# Altium PCB mesh_node.PcbDoc
Units mm, origin at the board's own origin, x right, y up, seen from the top; angles counter-clockwise.
Board outline 85 x 85 mm, 2 copper layers (Top Layer, Bottom Layer); 59 components, 64 nets, 274 pads, 0 vias.
Unrouted connection lines stored in the file: 175.
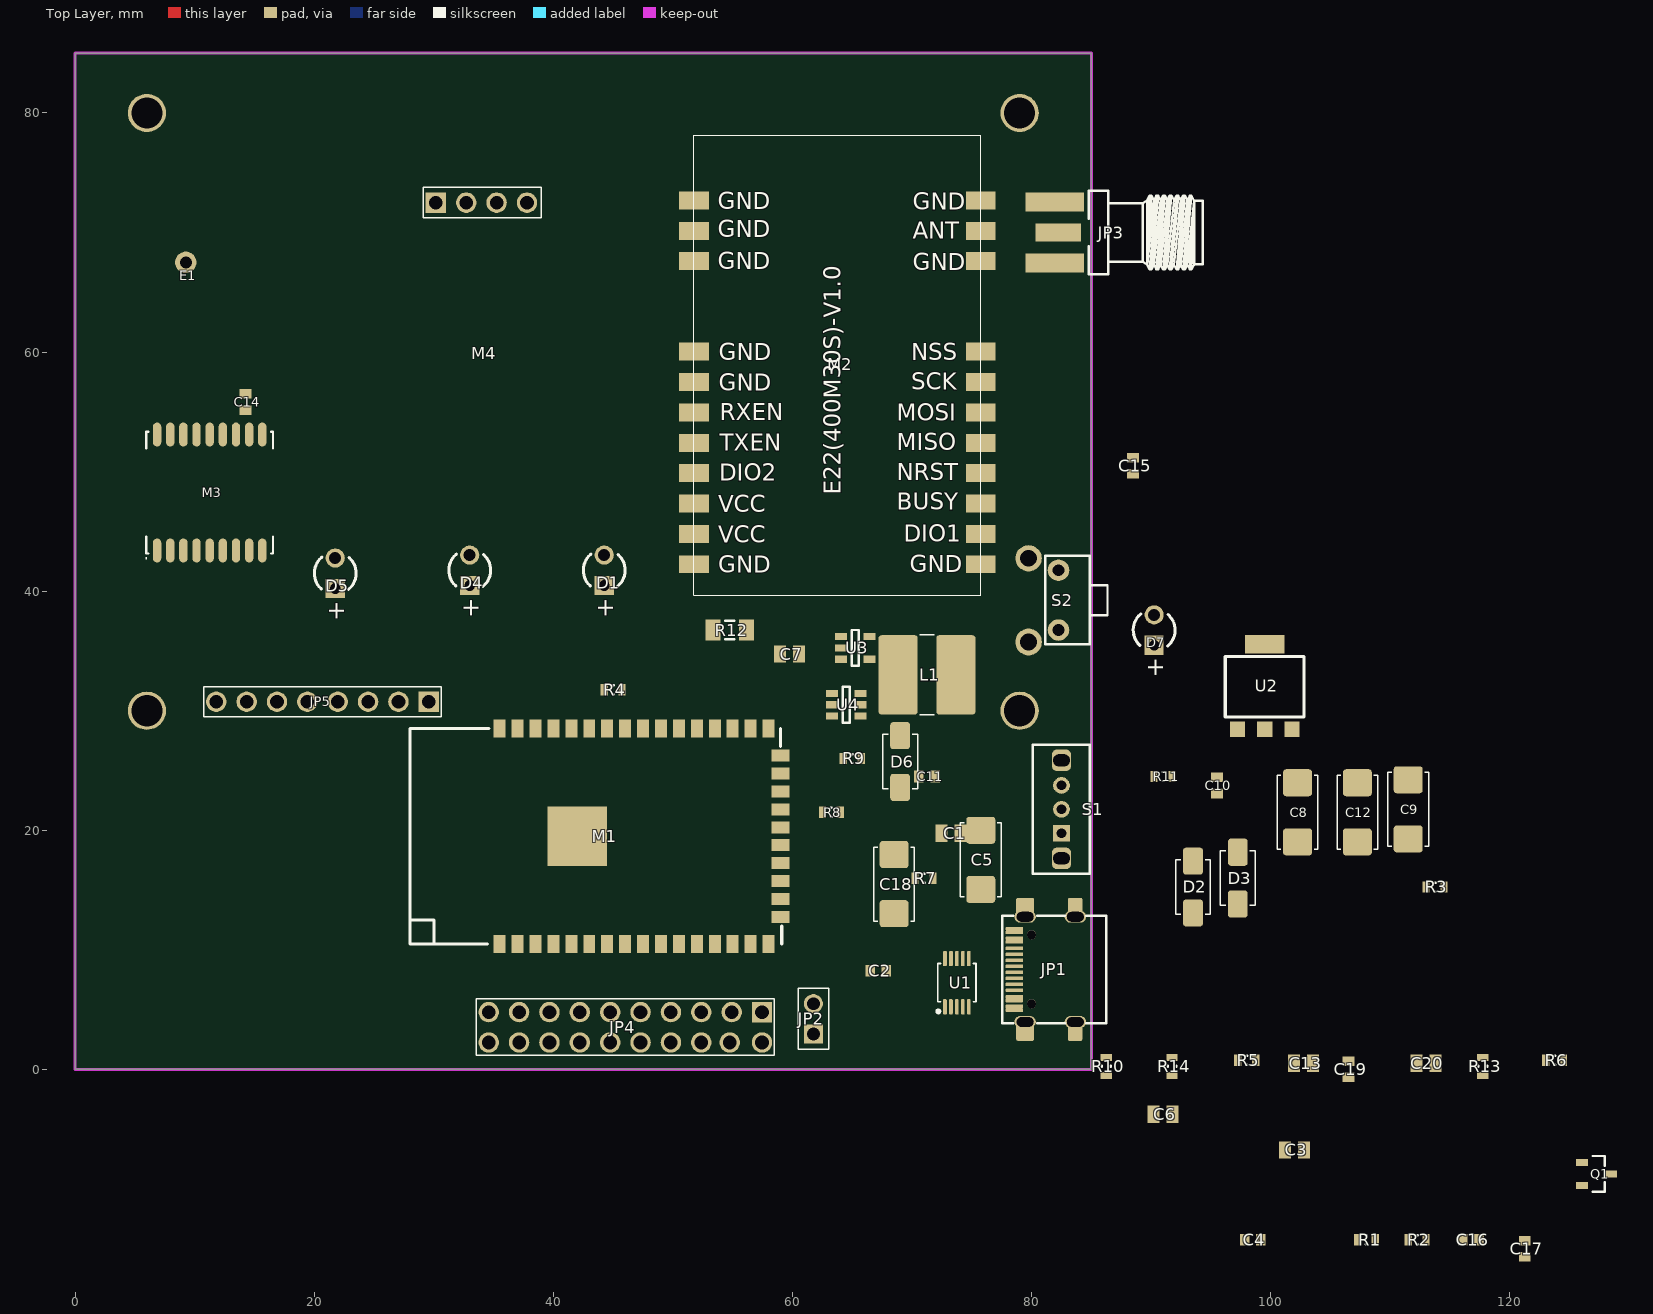
[diagram p0: Top Layer view]
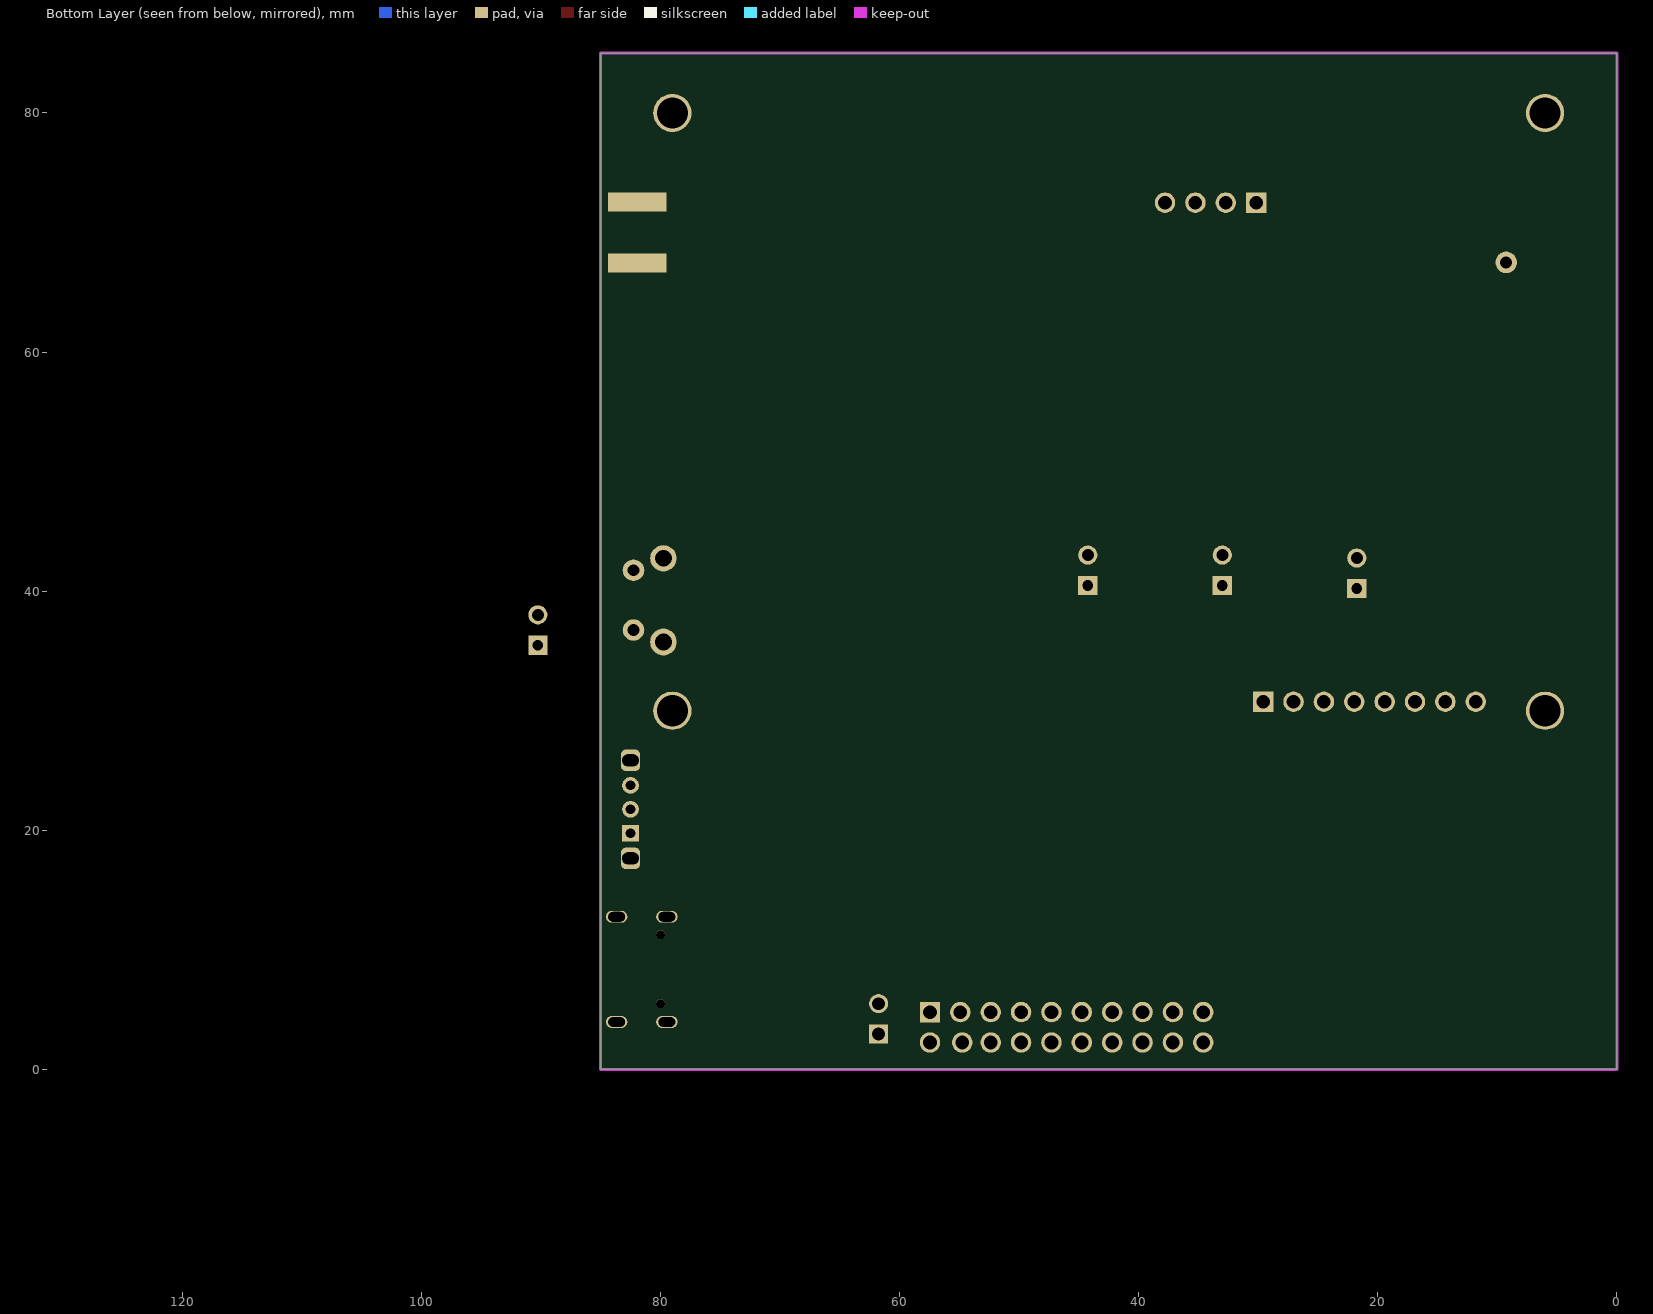
[diagram p1: Bottom Layer view, seen from below]

## Layer stack, top to bottom
Top Solder: solder mask 0.0102, Solder Resist, Dk 3.5
Top Layer: signal copper 0.0356
Dielectric 1: dielectric 0.32, FR-4, Dk 4.8
Bottom Layer: signal copper 0.0356
Bottom Solder: solder mask 0.0102, Solder Resist, Dk 3.5

## Board outline
0,0 85,0 85,85 0,85

## Design rules (kind name [scope] priority, off if disabled: settings)
Clearance [All] p1: gap=0.15 ignorepadtopadclearanceinfootprint=FALSE
PolygonConnect [All] p1: connectstyle=Relief reliefconductorwidth=0.254 reliefentries=4 polygonreliefangle="90 Angle" airgapwidth=0.254
RoutingVias [All] p1: holewidth=0.711 width=1.27 viastyle="Through Hole" minholewidth=0.711 minwidth=1.27 maxholewidth=0.711 maxwidth=1.27
SolderMaskExpansion [All] p1: expansion=0.102 istentingtop=FALSE
Width [All] p1: maxlimit=0.254 minlimit=0.254 preferedwidth=0.254
30 further rules are at their usual default settings.

## Components (designator, comment, footprint, x,y, rotation, side; value= is the part's Value field where it differs from the comment)
C1 "10uF" C-0805 73.25,19.75 r0 top
C2 "100nF" C-0603 67.175,8.25 r0 top
C3 "10uF" C-0805 102,-6.75 r0 top
C4 "CAPN" C-0603 98.499,-14.25 r0 top
C5 "CAPP" C_TANTAL_C 75.75,17.525 r90 top
C6 "10uF" C-0805 90.999,-3.75 r0 top
C7 "10uF" C-0805 59.75,34.75 r0 top
C8 "CAPP" C_TANTAL_C 102.25,21.5 r90 top
C9 "CAPP" C_TANTAL_C 111.5,21.75 r90 top
C10 "CAPN" C-0603 95.5,23.75 r90 top
C11 "CAPN" C-0603 71.25,24.5 r0 top
C12 "CAPP" C_TANTAL_C 107.25,21.5 r90 top
C13 "22uF" C-0805 102.75,0.5 r0 top
C14 "CAPN" C-0603 14.25,55.825 r90 top
C15 "CAPN" C-0603 88.5,50.5 r90 top
C16 "CAPN" C-0603 116.749,-14.25 r0 top
C17 "CAPN" C-0603 121.249,-15 r90 top
C18 "CAPP" C_TANTAL_C 68.5,15.5 r90 top
C19 "100nF" C-0603 106.5,0 r90 top
C20 "22uF" C-0805 113,0.5 r0 top
D1 "DLED" LED_3mm_RED 44.25,41.75 r90 top
D2 "DIODSH" D-SMA 93.5,15.25 r90 top
D3 "DIODSH" D-SMA 97.25,16 r90 top
D4 "DLED" LED_3mm_RED 33,41.75 r90 top
D5 "DLED" LED_3mm_RED 21.75,41.5 r90 top
D6 "DIODSH" D_SMA_NUM 69,25.75 r90 top
D7 "DLED" LED_3mm_RED 90.25,36.75 r90 top
E1 "GPS_PATCH" GPSANT_1818 9.25,67.5 r0 top
JP1 "L-KLS1-5473" USB_C_SMD_SLOT 78.56,8.365 r90 top
JP2 "HEADER 2" PLS1-2 61.75,2.96 r90 top
JP3 "EM-SA071-GGT" SMA_F_EDGE 83.5,70 r180 top
JP4 "HEADER 10X2" PLS2_10 57.45,4.79 r180 top
JP5 "HEADER8" PLS1-8 29.58,30.75 r180 top
L1 "3.3uH" CDRH6D38 71.25,33 r0 top
M1 "ESP-12K" ESP-12K 28,19.5 r90 top
M2 "E22-400M30S" PE22(400M30S) 51.75,72.68 r90 top
M3 "SIM28ML" LGA18_GNSS 11.25,48.25 r90 top
M4 "OLED0_96" OLED096_I2C 30.17,72.5 r0 top
Q1 "MMUN2211" SOT-23 127.25,-8.75 r0 top
R1 "1k" R-0603 107.999,-14.25 r0 top
R2 "1k" R-0603 112.249,-14.25 r0 top
R3 "RES" R-0603 113.749,15.25 r0 top
R4 "1k" R-0603 45,31.75 r0 top
R5 "4k7" R-0603 98,0.75 r0 top
R6 "RES" R-0603 123.75,0.75 r0 top
R7 "RES" R-0603 71,16 r0 top
R8 "RES" R-0603 63.25,21.5 r0 top
R9 "10k" R-0603 64.999,26 r0 top
R10 "100k" R-0603 86.25,0.25 r90 top
R11 "1k" R-0603 91,24.5 r0 top
R12 "nc" R-1206 54.75,36.75 r0 top
R13 "110k" R-0603 117.75,0.25 r90 top
R14 "15k" R-0603 91.75,0.25 r90 top
S1 "SW SPDT" SK-12D07VG5 82.5,21.75 r90 top
S2 "KLS7-TS3602 -3 15-180" KLS7-TS3602 82.25,39.25 r90 top
U1 "CH340E" MSOP-10 73.75,7.25 r0 top value={Value}
U2 "LDL1117" SOT223 99.5,32 r0 top
U3 "MCP73831-2ATI/OT" SOT-23-5 65.25,35.25 r0 top value={Value}
U4 "MT3608" SOT-23-6 64.5,30.5 r0 top

## Footprints (in the part's own frame and the unit in brackets; to place one, negate y for a bottom-side part, rotate by r counter-clockwise, add the part's x,y. Pads: shape width x height; smd on the part's side, far side on the other; paste and mask are expansions set on the pad)
C-0603 [mm] "Chip Capacitor, 2-Leads, Body 1,60x0,80mm, IPC Medium Density"
  rect 0.8x1 smd: 1(-0.675,0) 2(0.675,0)
  body extent -0.8,-0.4 0.8,0.4, height 0.8
C-0805 [mm] "Chip Capacitor, 2-Leads, Body 2,00x1,25mm, IPC Medium Density"
  rect 1x1.45 smd: 1(-0.8,0) 2(0.8,0)
  body extent -1,-0.62 1,0.63, height 1.25
C_TANTAL_C [mm] "Capacitor, Polarized, Molded Body; 6.00 mm L X 3.25 mm W X 2.80 mm H body"
  rrect22% 2.26x2.42 smd: 1(2.475,0) 2(-2.475,0)
  silkscreen extent -3.1,-1.7 3.1,1.7, body extent -3,-1.63 3,1.63, height 2.8
CDRH6D38 [mm] "Inductor, Molded Body; 6.50 mm L X 6.55 mm W X 4.00 mm H body"
  rrect15% 3.28x6.63 smd: 1(-2.415,0) 2(2.415,0)
  silkscreen extent -0.6,-3.35 0.6,3.35, body extent -3.35,-3.27 3.35,3.28, height 4
D-SMA [mm] "Diode, Molded Body; 4.315 mm L X 2.605 mm W X 2.41 mm H body"
  rrect30% 2.27x1.65 smd: 1(-2.165,0) 2(2.165,0)
  silkscreen extent -2.29,-1.46 2.29,1.46, body extent -2.61,-1.3 2.61,1.3, height 2.41
D_SMA_NUM [mm]
  rrect30% 2.27x1.65 smd: 1(2.165,0) 2(-2.165,0)
  silkscreen extent -2.29,-1.46 2.29,1.46, body extent -2.61,-1.3 2.61,1.3, height 2.41
ESP-12K [mm]
  rect 1.5x1 smd: 1(-9,-7.5) 2(-9,-9) 3(-9,-10.5) 4(-9,-12) 5(-9,-13.5) 6(-9,-15) 7(-9,-16.5) 8(-9,-18) 9(-9,-19.5) 10(-9,-21) 11(-9,-22.5) 12(-9,-24) 13(-9,-25.5) 14(-9,-27) 15(-9,-28.5) 16(-9,-30) 27(9,-30) 28(9,-28.5) 29(9,-27) 30(9,-25.5) 31(9,-24) 32(9,-22.5) 33(9,-21) 34(9,-19.5) 35(9,-18) 36(9,-16.5) 37(9,-15) 38(9,-13.5) 39(9,-12) 40(9,-10.5) 41(9,-9) 42(9,-7.5)
  rect 1x1.5 smd: 17(-6.75,-31) 18(-5.25,-31) 19(-3.75,-31) 20(-2.25,-31) 21(-0.75,-31) 22(0.75,-31) 23(2.25,-31) 24(3.75,-31) 25(5.25,-31) 26(6.75,-31)
  rect 5x5 smd: 43(0,-14)
  silkscreen extent -9,-31.1 9,0, body extent -9.1,-31.1 8.89,-0.1, height 2.9
GPSANT_1818 [mm]
  round 1.8 hole 1: 1(0,0)
  body extent -9,-10.1 9,7.9, height 5
KLS7-TS3602 [mm] "miniature switch"
  round 1.8 hole 1: 1(-2.5,0) 2(2.5,0)
  oval 2.25x2.2 hole 1.4: 3(-3.5,2.5)
  round 2.2 hole 1.4: 3(3.5,2.5)
  silkscreen extent -3.7,-4.1 3.7,1.1, body extent -3.7,-3.97 3.6,3.75, height 4.4
LED_3mm_RED [mm]
  rect 1.6x1.6 hole 0.9: 1(-1.27,0)
  round 1.6 hole 1: 2(1.27,0)
  silkscreen extent -1.34,-1.75 1.34,1.75, body extent -1.9,-1.9 1.6,1.9, height 5.75
LGA18_GNSS [mm] "8-Leads, Body 10,10x9,70mm, Pitch 1,10mm"
  oval 2x0.7 smd mask+0.1: 1(-4.85,4.4) 2(-4.85,3.3) 3(-4.85,2.2) 4(-4.85,1.1) 5(-4.85,0) 6(-4.85,-1.1) 7(-4.85,-2.2) 8(-4.85,-3.3) 9(-4.85,-4.4) 10(4.85,-4.4) 11(4.85,-3.3) 12(4.85,-2.2) 13(4.85,-1.1) 14(4.85,0) 15(4.85,1.1) 16(4.85,2.2) 17(4.85,3.3) 18(4.85,4.4)
  silkscreen extent -5.55,-5.3 5.1,5.35, body extent -4.95,-5.15 4.95,5.15, height 2.6
MSOP-10 [mm] "Small Outline Pkg (SOP), 0.50 mm pitch; 10 pin, 3.00 mm L X 3.00 mm W X 1.10 mm H body"
  rrect52% 0.31x1.27 smd: 1(-1,-2.015) 2(-0.5,-2.015) 3(0,-2.015) 4(0.5,-2.015) 5(1,-2.015) 6(1,2.015) 7(0.5,2.015) 8(0,2.015) 9(-0.5,2.015) 10(-1,2.015)
  silkscreen extent -1.68,-2.52 1.6,1.6, body extent -1.5,-2.42 1.5,2.42, height 1.1
OLED096_I2C [mm] "Header, Vertical, 2.54 mm pitch; 0.70 mm lead width, 7 pins, 1 row, 7 pins per row, 16.51 mm L X 2.54 mm W X 7.54 mm H body"
  rect 1.71x1.71 hole 1.14 paste-2539.97: 1(0,0)
  round 1.71 hole 1.14 paste-2539.97: 2(2.54,0) 3(5.08,0) 4(7.62,0)
  silkscreen extent -1.04,-1.27 8.8,1.27, body extent -10.19,-26.7 17.81,1.3, height 7.08
PE22(400M30S) [mm] "38.5mm*24mm*3.8mm-S"
  rect 1.5x2.5 smd: 1(0,0) 2(-2.54,0) 3(-5.08,0) 4(-12.65,0) 5(-15.19,0) 6(-17.73,0) 7(-20.27,0) 8(-22.81,0) 9(-25.35,0) 10(-27.89,0) 11(-30.43,0) 12(-30.43,-24) 13(-27.89,-24) 14(-25.35,-24) 15(-22.81,-24) 16(-20.27,-24) 17(-17.73,-24) 18(-15.19,-24) 19(-12.65,-24) 20(-5.08,-24) 21(-2.54,-24) 22(0,-24)
  silkscreen extent -33.04,-24 5.46,0, body extent -32.81,-24.01 5.69,0.01, height 3.87
PLS1-2 [mm] "Header, Vertical, 2.54 mm pitch; 0.64 mm lead width, 2 pins, 1 row, 2 pins per row, 5.08 mm L X 2.54 mm W X 8.54 mm H body"
  rect 1.59x1.59 hole 1.06 paste-2539.97: 1(0,0)
  round 1.59 hole 1.06 paste-2539.97: 2(2.54,0)
  silkscreen extent -1.27,-1.27 3.81,1.27, body extent -1.27,-1.27 3.81,1.27, height 8.54
PLS1-8 [mm] "Header, Vertical, 2.54 mm pitch; 0.70 mm lead width, 8 pins, 1 row, 8 pins per row, 19.05 mm L X 2.54 mm W X 7.54 mm H body"
  rect 1.71x1.71 hole 1.14 paste-2539.97: 1(0,0)
  round 1.71 hole 1.14 paste-2539.97: 2(2.54,0) 3(5.08,0) 4(7.62,0) 5(10.16,0) 6(12.7,0) 7(15.24,0) 8(17.78,0)
  silkscreen extent -1.04,-1.27 18.82,1.27, body extent -0.64,-1.27 18.42,1.27, height 7.54
PLS2_10 [mm] "Header, Vertical, 2.54 mm pitch; 0.70 mm lead width, 10 pins, 1 row, 10 pins per row, 24.13 mm L X 2.54 mm W X 7.54 mm H body"
  rect 1.71x1.71 hole 1.14 paste-2539.97: 1(0,0)
  round 1.71 hole 1.14 paste-2539.97: 2(0,2.54) 3(2.54,0) 4(2.7,2.54) 5(5.08,0) 6(5.08,2.54) 7(7.62,0) 8(7.62,2.54) 9(10.16,0) 10(10.16,2.54) 11(12.7,0) 12(12.7,2.54) 13(15.24,0) 14(15.24,2.54) 15(17.78,0) 16(17.78,2.54) 17(20.32,0) 18(20.32,2.54) 19(22.86,0) 20(22.86,2.54)
  silkscreen extent -1.04,-1.1 23.9,3.6, body extent -1.27,-1.27 24.13,3.81, height 8.54
R-0603 [mm] "Chip Resistor, 2-Leads, Body 1,60x0,82mm, IPC Medium Density"
  rect 0.6x0.95 smd: 1(-0.75,0) 2(0.75,0)
  silkscreen extent -0.05,-0.38 0.05,0.38, body extent -0.8,-0.4 0.8,0.4, height 0.45
R-1206 [mm] "Chip Resistor, 2-Leads, Body 3,20x1,60mm, IPC Medium Density"
  rect 1.25x1.75 smd: 1(-1.4,0) 2(1.4,0)
  silkscreen extent -0.4,-0.77 0.4,0.77, body extent -1.6,-0.8 1.6,0.8, height 0.55
SK-12D07VG5 [mm]
  rect 1.4x1.4 hole 0.8: 1(-2,0)
  round 1.4 hole 0.8: 2(0,0) 3(2,0)
  rrect50% 1.8x1.6 hole 1 slot 1.4 at 90 deg: S1(-4.1,0) S1(4.1,0)
  silkscreen extent -5.4,-2.35 5.4,2.4, body extent -4.3,-7.05 4.3,2.3, height 4.75
SMA_F_EDGE [mm] "SMA End Launch Jack for 1.58mm PCB, 50 Ohm, Flat Tab Contact"
  rect 3.81x1.5 smd: 1(1.27,0)
  rect 4.9x1.6 smd: 2(1.575,2.54) 2(1.575,-2.54)
  rect 4.9x1.6 smd far side: 2(1.575,2.54) 2(1.575,-2.54)
  silkscreen extent -10.81,-3.5 -1.28,3.5, body extent -10.73,-3.25 2.77,3.25, height 3.7
SOT223 [mil]
  rect 50x50 smd: 1(-90,-140) 2(0,-140) 3(90,-140)
  rect 130x60 smd: 4(0,140)
  silkscreen extent -130,-100 130,100, body extent -128,-138 128,138, height 67
SOT-23 [mm]
  rect 1x0.6 smd: 1(-1.2,0.95) 2(-1.2,-0.95) 3(1.2,0)
  silkscreen extent -0.3,-1.5 0.7,1.5, body extent -1.25,-1.5 1.25,1.5, height 1.2
SOT-23-5 [mm] "SOT23, 5-Leads, Body 2,90x2,45mm, Pitch 0,95mm, IPC Medium Density"
  rect 1x0.6 smd: 1(-1.2,0.95) 2(-1.2,0) 3(-1.2,-0.95) 4(1.2,-0.95) 5(1.2,0.95)
  silkscreen extent -0.3,-1.5 0.3,1.5, body extent -1.4,-1.45 1.4,1.45, height 1.55
SOT-23-6 [mm] "SOT23, 6-Leads, Body 2,90x2,45mm, Pitch 0,95mm, IPC Medium Density"
  rect 1x0.6 smd: 1(-1.2,0.95) 2(-1.2,0) 3(-1.2,-0.95) 4(1.2,-0.95) 5(1.2,0) 6(1.2,0.95)
  silkscreen extent -0.3,-1.5 0.3,1.5, body extent -1.4,-1.45 1.4,1.45, height 1.55
USB_C_SMD_SLOT [mm] "USB 3.1 Type C"
  rrect20% 1.8x1.2 smd mask+0.07: 1(-5.08,-5.08) 1(5.08,-5.08)
  rrect20% 1.8x1.5 smd mask+0.07: 1(-5.08,-0.9) 1(5.08,-0.9)
  oval 1x1.8 hole 0.8 slot 1.4 at 90 deg: 1(-4.4,-5.1) 1(-4.4,-0.9) 1(4.4,-5.1) 1(4.4,-0.9)
  rrect30% 0.3x1.45 smd paste-2 mask+0.07: A1(-3.1,0) A4(-2.6,0) A9(2.6,0) A12(3.4,0) B1(3.1,0) B4(2.3,0) B9(-2.3,0) B12(-3.4,0)
  rrect30% 0.3x1.45 smd mask+0.07: A5(-1.25,0) A6(-0.25,0) A7(0.25,0) A8(1.25,0) B5(1.75,0) B6(0.75,0) B7(-0.75,0) B8(-1.75,0)
  round 0.75 hole 0.75 unplated paste-2539.97 mask+0.07: MH(-2.885,-1.44) MH(2.885,-1.44)
  silkscreen extent -4.5,-7.69 4.5,1, body extent -4.47,-7.7 4.47,0.2, height 3.2

## Part data
C1 C2 C3 C6 C7 C13 C19 C20: library part CAPN, Voltage=50V, Вид=Конденсатор, Точність/група=NP0
C4 C10 C11 C14 C15 C16 C17: Voltage=50V, Вид=Конденсатор, Точність/група=NP0
C5 C8 C9 C12 C18: Voltage=16V, Вид=Конденсатор
E1: library part ANT, Вид=Антена, Примітки=Пряма
JP3: library part SMA, "SMA Female R/A PCB Mount", Вид=Роз'єм
L1: library part L*, Вид=Індуктивність
M2: library part E22
M4: library part OLED0_96_I2C
R1 R2 R4 R5 R9 R10 R11 R12 R13 R14: library part RES, Вид=Резистор, Точність/група=5%
S2: library part SW-1, Вид=Кнопка
U2: "LOW CURRENT ADJUSTABLE  VOLTAGE REGULATOR", Вид=Мікросхема
U3: Man#Part Num#=TPS61023DRLT, Manufacturer="Texas Instruments", Package=SOT-563, Temperature Range="-40°C ~ 125°C (TJ)", Component Type=SMD, Footprint Part=IC-package.PcbLib, IC Type=PMIC, Library Part=IC`s.SchLib, Mounting  Method=SMD, Part Number=MCP73831-2ATI/OT, Part Type=IC, Suplier 1=https://www.digikey.com.au/en/products/detail/texas-instruments/TPS61023DRLT/11310622?s=N4IgTCBcDaICoAUDKA2AjABjAZgCICUAZOEAXQF8g, URL=https://www.ti.com/general/docs/suppproductinfo.tsp?distId=10&gotoUrl=https%3A%2F%2Fwww.ti.com%2Flit%2Fgpn%2Ftps61023
D1 D4 D5 D7: Вид=Світлодіод
D2 D3 D6: Вид=Діод
JP1 U1: Mounting  Method=SMD
JP2 JP4 JP5: Вид=Роз'єм
M3: Вид=Модуль
Q1: Вид=Транзистор
R3 R6 R7 R8: Вид=Резистор, Точність/група=5%
S1: Вид=Перемикач

## Free pads (board coordinates)
  round 3.2 hole 2.6: 1(6,30) 1(6,80) 1(79,30) 1(79,80)

## Nets (pads, with @x,y where several pads share a name; then routed paths per layer and width w, separated by ;. In a path a pad name is that pad's centre, name@x,y a point inside that pad or via, vN(x,y) a via of type N, cw(c..) or ccw(c..) an arc to the next point about the centre after c; other vN are vias at no path point)
1PPS: M3.4 Q1.1
+5V: C16.1 C17.1 C18.2 C19.1 C20.1 D6.2 M2.9 M2.10 R12.1 R13.2
AIN0_VBATT: M1.30 R6.1 R7.2
ANT_SW: M1.25 M2.6
BOOT: JP5.6 M1.3 R3.1
BUSY: M1.16 M2.14
DN: JP1.A7 JP1.B7 U1.2
DP: JP1.A6 JP1.B6 U1.1
EN: C11.1 JP5.5 M1.41 R8.1
GND: C1.1 C2.1 C3.2 C4.2 C5.1 C6.2 C7.1 C8.1 C9.1 C10.2 C11.2 C12.1 C13.2 C16.2 C17.2 C18.1 C19.2 C20.2 D1.2 D4.2 JP1.A1 JP1.A12 JP1.B1 JP1.B12 JP2.2 JP3.2 JP4.19 JP4.20 JP5.8 M1.1 M1.26 M1.42 M1.43 M2.1 M2.2 M2.3 M2.4 M2.5 M2.11 M2.12 M2.20 M2.22 M3.1 M3.10 M3.12 M4.1 pad.1 Q1.2 R5.1 R7.1 R10.1 R14.1 S2.1 U1.3 U2.1 U3.2 U4.2
GPS_RX: M1.22 M3.2
GPS_TX: M1.24 M3.3
IO6: JP4.1 M1.9
IO7: JP4.3 M1.10
IO8: JP4.5 M1.11
IO9: JP4.7 M1.12
IO10: JP4.9 M1.13
IO11: JP4.2 M1.14
IO15: JP4.4 M1.18
IO16: JP4.6 M1.19
IO17: JP4.8 M1.20
IO18: JP4.10 M1.21
IO39: JP5.1 M1.33
IO40: JP5.2 M1.34
IO41: JP5.3 M1.35
IO42: JP5.4 M1.36
IO43: JP4.11 M1.37
IO44: JP4.12 M1.38
IO45: JP4.14 M1.39
IO46: JP4.16 M1.40
KEY: M1.23 R9.2 S2.2
LED1: M1.15 R2.2
LED2: M1.5 R1.2
MISO: M1.29 M2.16
MOSI: M1.28 M2.17
NetC9_2: C9.2 M3.6
NetC14_1: C14.1 M3.11
NetC14_2: C14.2 E1.1
NetC15_1: C15.1 M2.21
NetC15_2: C15.2 JP3.1
NetD1_1: D1.1 R1.1
NetD2_2: D2.2 D3.2 S1.2
NetD4_1: D4.1 R2.1
NetD5_2: D5.2 R4.2
NetD6_1: D6.1 L1.2 U4.1
NetD7_1: D7.1 R11.1
NetD7_2: D7.2 Q1.3
NetR4_1: R4.1 U3.1
NetR5_2: R5.2 U3.5
NetR13_1: R13.1 R14.2 U4.3
NSS: M1.32 M2.19
RF_EN: R10.2 U4.4
RF_IRQ: M1.17 M2.13
RF_RST: M1.31 M2.15
RXD: M1.6 U1.8
SCK: M1.27 M2.18
SCL: JP4.13 M1.8 M4.3
SDA: JP4.15 M1.7 M4.4
TXD: M1.4 U1.9
TXEN: M2.7 M2.8
V_BATT: C7.2 D3.1 JP2.1 R6.2 U3.3
V_IN: C3.1 C13.1 L1.1 R12.2 S1.3 U2.3 U4.5
VBUS: C1.2 D2.1 D5.1 JP1.A4 JP1.A9 JP1.B4 JP1.B9 U3.4
VCC: C2.2 C4.1 C5.2 C6.1 C8.2 C10.1 C12.2 JP4.17 JP4.18 JP5.7 M1.2 M3.8 M4.2 R3.2 R8.2 R9.1 R11.2 U1.7 U1.10 U2.2 U2.4
pads on no net: JP1.1 JP1.A5 JP1.A8 JP1.B5 JP1.B8 JP1.MH M3.5 M3.7 M3.9 M3.13 M3.14 M3.15 M3.16 M3.17 M3.18 S1.1 S1.S1 S2.3 U1.4 U1.5 U1.6 U4.6

## Keep-outs
Keep-Out Layer:
  the board outline again, w0.254

## Text inside footprints (layer, text, board x,y; h text height)
D1: Top Overlay "+" at 45,37.75 h1.5 r90
D4: Top Overlay "+" at 33.75,37.75 h1.5 r90
D5: Top Overlay "+" at 22.5,37.5 h1.5 r90
D7: Top Overlay "+" at 91,32.75 h1.5 r90
M2: Top Overlay "E22(400M30S)-V1.0" at 64.028,48.081 h1.4 r90; Top Overlay "GND" at 53.846,59.314 h1.4; Top Overlay "GND" at 53.846,56.781 h1.4; Top Overlay "RXEN" at 53.919,54.278 h1.4; Top Overlay "TXEN" at 53.919,51.745 h1.4; Top Overlay "DIO2" at 53.867,49.242 h1.4; Top Overlay "VCC" at 53.801,46.604 h1.4; Top Overlay "VCC" at 53.801,44.07 h1.4; Top Overlay "GND" at 53.801,41.537 h1.4; Top Overlay "GND" at 53.741,66.937 h1.4; Top Overlay "GND" at 53.741,69.61 h1.4; Top Overlay "GND" at 53.741,71.932 h1.4; Top Overlay "GND" at 70.041,71.905 h1.4; Top Overlay "ANT" at 70.041,69.478 h1.4; Top Overlay "GND" at 70.041,66.836 h1.4; Top Overlay "GND" at 69.814,41.601 h1.4; Top Overlay "DIO1" at 69.302,44.148 h1.4; Top Overlay "BUSY" at 68.729,46.809 h1.4; Top Overlay "NRST" at 68.729,49.274 h1.4; Top Overlay "MISO" at 68.729,51.799 h1.4; Top Overlay "MOSI" at 68.729,54.264 h1.4; Top Overlay "SCK" at 69.92,56.864 h1.4; Top Overlay "NSS" at 69.92,59.329 h1.4